# Altium PCB LinearActuator_PCB.PcbDoc
Units mm, origin at the board's own origin, x right, y up, seen from the top; angles counter-clockwise.
Board outline 80 x 25 mm, 2 copper layers (Top Layer, Bottom Layer); 27 components, 34 nets, 114 pads, 2 vias.
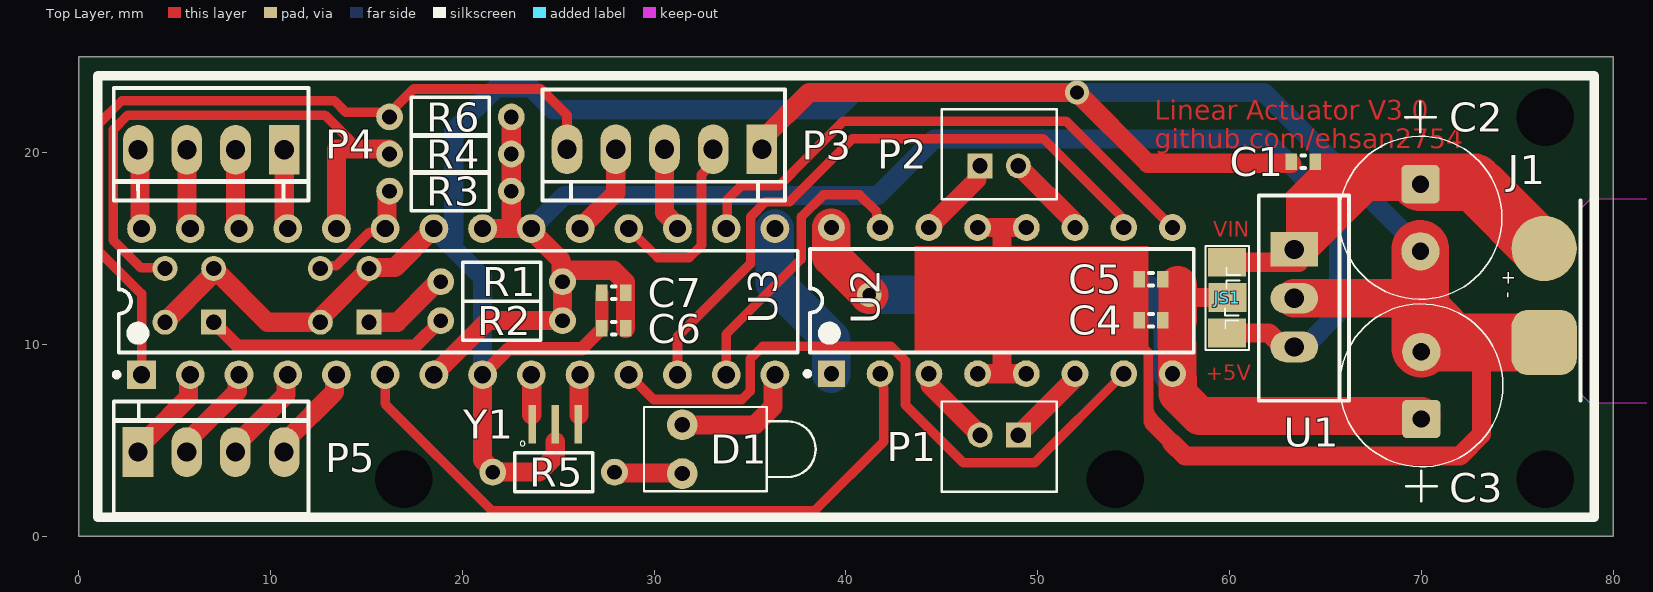
[diagram p0: Top Layer view]
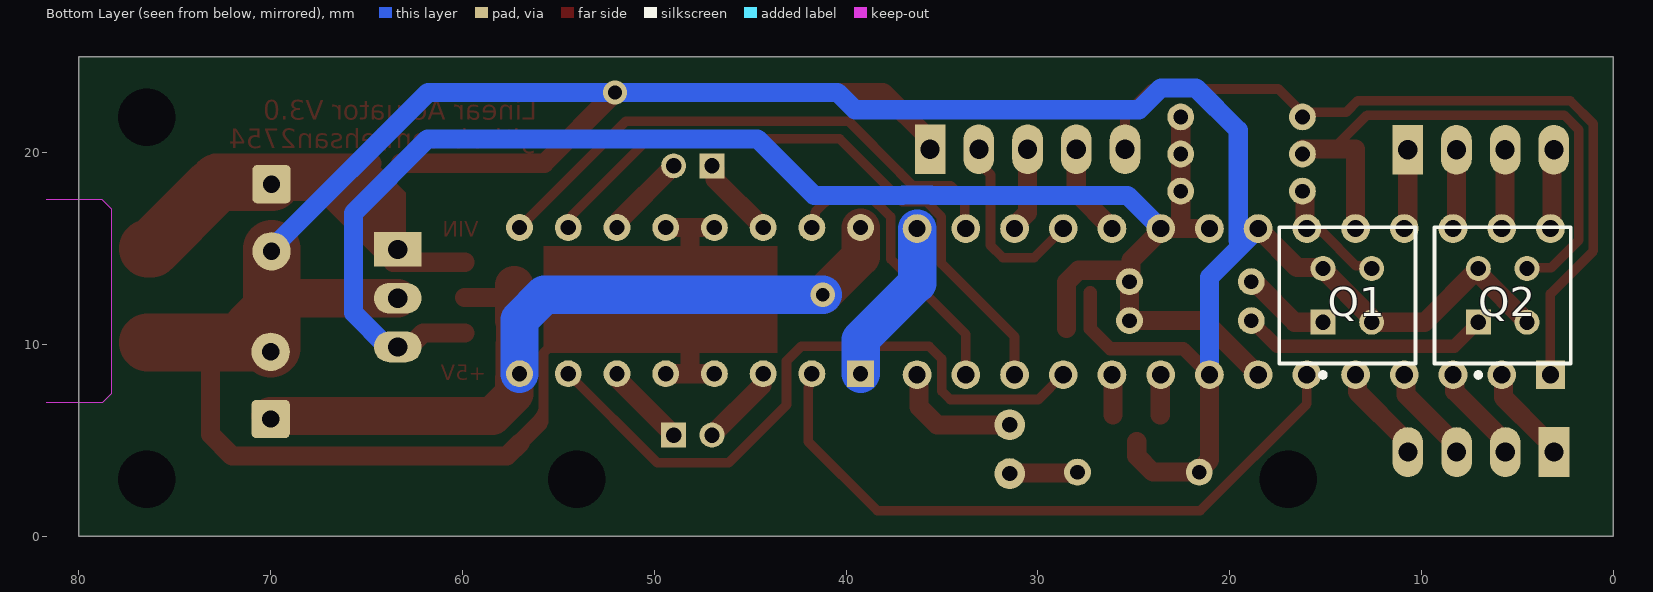
[diagram p1: Bottom Layer view, seen from below]
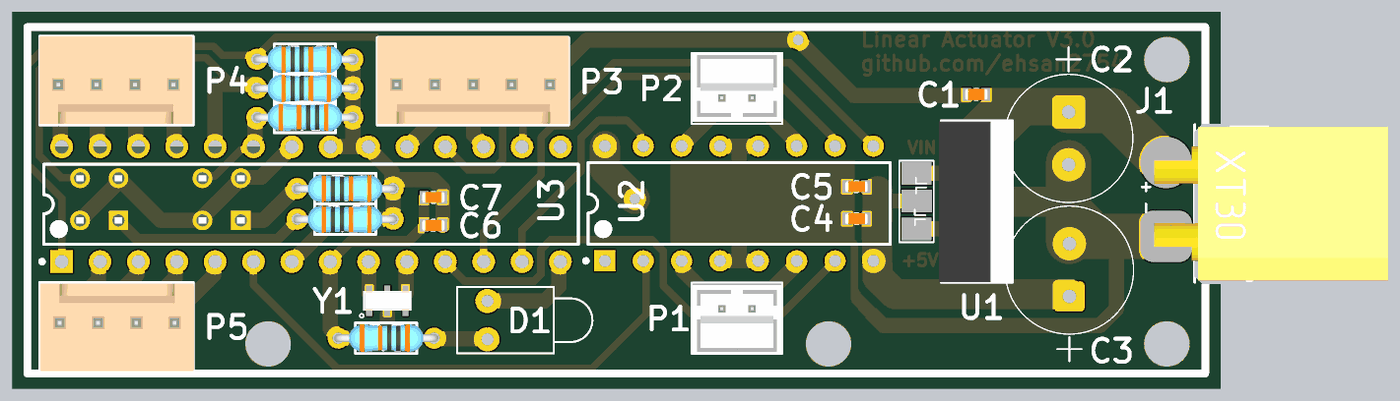
[diagram p2: 3D render of the assembled board from above, using the file's embedded part models]

## Layer stack, top to bottom
Top Solder: solder mask 0.0102, Solder Resist, Dk 3.5
Top Layer: signal copper 0.0356
Dielectric 1: dielectric 0.32, FR-4, Dk 4.8
Bottom Layer: signal copper 0.0356
Bottom Solder: solder mask 0.0102, Solder Resist, Dk 3.5

## Board outline
0,0 80,0 80,25 0,25

## Design rules (kind name [scope] priority, off if disabled: settings)
Clearance [All] p1: gap=0.254 ignorepadtopadclearanceinfootprint=FALSE except(0: Arc-Hole Track-Hole SMDPad-Hole THPad-Hole Via-Hole Fill-Hole Poly-Hole Region-Hole Text-Hole)
PolygonConnect [All] p1: connectstyle=Relief reliefconductorwidth=0.254 reliefentries=4 polygonreliefangle="90 Angle" airgapwidth=0.254
RoutingVias [All] p1: holewidth=0.711 width=2.5 viastyle="Through Hole" minholewidth=1.5 minwidth=1.27 maxholewidth=4 maxwidth=5
SolderMaskExpansion [All] p1: expansion=0.102 istentingtop=FALSE
Width [All] p1: maxlimit=3 minlimit=0.5 preferedwidth=0.7
30 further rules are at their usual default settings.

## Components (designator, comment, footprint, x,y, rotation, side; value= is the part's Value field where it differs from the comment)
C1 "100nF" SMD_CAP_0603 63.837,19.525 r180 top
C2 "470uF,50V" "CAPE R3.5" 69.949,16.607 r270 top
C3 "220uf,25V" "CAPE R3.5" 69.997,7.867 r90 top
C4 "100nF" SMD_CAP_0603 55.903,11.27 r180 top
C5 "1uF" SMD_CAP_0603 55.903,13.404 r180 top
C6 "100nF" SMD_CAP_0603 27.886,10.838 r180 top
C7 "1uF" SMD_CAP_0603 27.886,12.693 r180 top
D1 "LED1" LED-1 31.468,4.539 r0 top
J1 "XT30-M" "XT30-M side" 76.4,15.004 r270 top
JS1 "JumperSMD 3Pin" "JumperSMD 3Pin" 59.916,13.471 r180 top
P1 "Connector" "PH Connector 2Pin" 47.935,5.326 r180 top
P2 "Connector" "PH Connector 2Pin" 48.035,19.265 r0 top
P3 "Connector" "Polarized Header 5" 30.579,20.149 r180 top
P4 "Connector" "Polarized Header 4" 6.875,19.949 r180 top
P5 "Connector" "Polarized Header 4" 6.925,4.587 r0 top
Q1 "CNY70" FP-6_544-5062_01-4-MFG 13.866,12.56 r90 bottom
Q2 "CNY70" FP-6_544-5062_01-4-MFG 5.763,12.56 r90 bottom
R1 "330R" Res-(1/4) 22.044,13.277 r0 top
R2 "330R" Res-(1/4) 22.044,11.245 r0 top
R3 "10K" Res-(1/4) 19.377,17.996 r180 top
R4 "10K" Res-(1/4) 19.377,19.929 r0 top
R5 "330R" Res-(1/4) 24.757,3.345 r180 top
R6 "10K" Res-(1/4) 19.377,21.862 r0 top
U1 "78M05" TO220-AB-Stand 63.354,12.432 r270 top
U2 "L293D" STM-L293D-16 48.13,12.285 r90 top
U3 "ATmega8-16PU" 28P3 19.784,12.235 r90 top
Y1 "CSTCE8M00G55-R0" *OSC_CSTCE8M00G55-R0 24.838,5.835 r0 top

## Footprints (in the part's own frame and the unit in brackets; to place one, negate y for a bottom-side part, rotate by r counter-clockwise, add the part's x,y. Pads: shape width x height; smd on the part's side, far side on the other; paste and mask are expansions set on the pad)
28P3 [mm] "28-Pin Plastic Dual In-Line Package (PDIP)"
  rect 1.5x1.5 hole 0.9: 1(-3.81,16.51)
  round 1.5 hole 0.9: 2(-3.81,13.97) 3(-3.81,11.43) 4(-3.81,8.89) 5(-3.81,6.35) 6(-3.81,3.81) 7(-3.81,1.27) 8(-3.81,-1.27) 9(-3.81,-3.81) 10(-3.81,-6.35) 11(-3.81,-8.89) 12(-3.81,-11.43) 13(-3.81,-13.97) 14(-3.81,-16.51) 15(3.81,-16.51) 16(3.81,-13.97) 17(3.81,-11.43) 18(3.81,-8.89) 19(3.81,-6.35) 20(3.81,-3.81) 21(3.81,-1.27) 22(3.81,1.27) 23(3.81,3.81) 24(3.81,6.35) 25(3.81,8.89) 26(3.81,11.43) 27(3.81,13.97) 28(3.81,16.51)
  silkscreen extent -3.93,-17.7 2.65,17.93, body extent -3.6,-17.65 3.6,17.65, height 4.58
*OSC_CSTCE8M00G55-R0 [mm]
  rect 0.4x2 smd: 1(-1.2,0) 2(0,0) 3(1.2,0)
  silkscreen extent -1.83,-1.13 -1.57,-0.87, body extent -1.6,-0.65 1.6,0.65, height 1
"CAPE R3.5" [mm]
  round 0.508 on Mech15: 0(0,0)
  rrect25% 2x2 hole 0.9: 1(-1.75,0)
  round 2 hole 0.9: 2(1.75,0)
  silkscreen extent -6.05,-4.25 4.25,4.25, body extent -4.25,-4.25 4.22,4.23, height 7.1
FP-6_544-5062_01-4-MFG [mm]
  rect 1.3x1.3 hole 0.8 paste-1000 mask+0: 1(-1.4,1.27)
  round 1.3 hole 0.8 paste-1000 mask+0: 2(1.4,1.27) 3(-1.4,-1.27) 4(1.4,-1.27)
  silkscreen extent -4.27,-3.55 3.55,3.55, body extent -3.5,-3.5 3.5,3.5, height 6
"JumperSMD 3Pin" [mm]
  rect 2x1.5 smd: 1(0.051,2.87) 2(0.025,1.016) 3(0.051,-0.813)
  silkscreen extent -1.09,-1.66 1.18,3.77
LED-1 [mm] "LED; 2 Leads"
  round 1.6 hole 0.8: 1(0,1.27) 2(0,-1.27)
  silkscreen extent -2,-2.2 6.95,2.2
"PH Connector 2Pin" [mm]
  rect 1.3x1.3 hole 0.8: 1(-1.05,0.05)
  round 1.3 hole 0.8: 2(0.95,0.05)
  silkscreen extent -3.05,-1.7 2.95,3, body extent -3.05,-1.57 2.95,3.08, height 6.07
"Polarized Header 4" [mm]
  rect 1.6x2.6 hole 1: 1(-3.84,-0.2)
  oval 1.6x2.6 hole 1: 2(-1.3,-0.2) 3(1.24,-0.2) 4(3.78,-0.2)
  silkscreen extent -5.1,-3.42 5.05,2.45, body extent -5.06,-3.43 5.1,2.37, height 10.75
"Polarized Header 5" [mm]
  rect 1.6x2.6 hole 1: 1(-5.035,-0.03)
  oval 1.6x2.6 hole 1: 2(-2.495,-0.03) 3(0.045,-0.03) 4(2.585,-0.03) 5(5.125,-0.03)
  silkscreen extent -6.25,-3.15 6.4,2.65, body extent -6.3,-3.23 6.4,2.57, height 10.75
Res-(1/4) [mil]
  round 55 hole 30: 1(-125,0) 2(125,0)
  silkscreen extent -80,-40 80,40, body extent -135,-36 135,36, height 115
SMD_CAP_0603 [mm]
  rect 0.6x0.85 smd: 1(-0.622,0) 2(0.622,0)
  silkscreen extent -0.1,-0.33 0.1,0.33, body extent -0.76,-0.38 0.76,0.38, height 0.6
STM-L293D-16 [mm] "DIP, 16-Leads, Body 20x6.85mm, Pitch 2.54mm"
  rect 1.4x1.4 hole 0.8: 1(-3.81,8.89)
  round 1.4 hole 0.8: 2(-3.81,6.35) 3(-3.81,3.81) 4(-3.81,1.27) 5(-3.81,-1.27) 6(-3.81,-3.81) 7(-3.81,-6.35) 8(-3.81,-8.89) 9(3.81,-8.89) 10(3.81,-6.35) 11(3.81,-3.81) 12(3.81,-1.27) 13(3.81,1.27) 14(3.81,3.81) 15(3.81,6.35) 16(3.81,8.89)
  silkscreen extent -3.93,-10 2.7,10.26, body extent -3.93,-10 3.93,10, height 5.1
TO220-AB-Stand [mm]
  rect 1.8x2.5 hole 1: 1(-2.521,0.016)
  oval 1.6x2.5 hole 1: 2(0.019,0.016) 3(2.559,0.016)
  silkscreen extent -5.33,-1.83 5.37,2.87, body extent -5.3,-2 5.37,2.83, height 20.86
"XT30-M side" [mm]
  rrect50% 3.4x3.4 smd: MINUS(4.9,0)
  round 3.4 smd: PLUS(0,0)
  Top Layer pour cut-out: -1.75,1.9 -1.75,0 0,-1.75 4.775,-1.75 6.65,0.125 6.65,2.7 -1.625,2.7 -1.775,2.55
  Keep-Out Layer board cut-out: -2.575,14.775 -2.575,2.4 -2.075,1.9 7.575,1.9 8.05,2.375 8.05,14.775
  silkscreen extent -2.5,1.9 7.93,1.9, body extent -2.47,-0.8 7.93,14.7, height 4

## Part data
C1 C4 C5 C6 C7: library part Cap-Bipolar, "Bipolar Capacitor", Voltage=100V, Adding Date=1387/12/20, Designer="Saeid Jorablo", Organazation=ControTec
C2 C3: library part "Capacitor Polarized", Designer="Hamed Jafarzadeh ( R2T )"
D1: "Typical RED GaAs LED", LatestRevisionDate=08-Jul-2005, LatestRevisionNote="Mech Layer 1 removed.", PackageDescription="LED; 2 Leads", PackageReference=LED-1, Published=8-Jun-2000, Publisher="Altium Limited"
J1: Package="Package Analog Devices", Availability=Unavailable, MF=AMASS, MP=XT60-M, Price=None, SnapEDA_Link=https://www.snapeda.com/parts/XT60-M/AMASS/view-part/?ref=snap
P1 P2: library part "Connector 2Pin", Designer="Hamed Jafarzadeh - www.R2T.ir"
P3: library part "Connector 5Pin", Designer="Hamed Jafarzadeh - www.R2T.ir"
P4 P5: library part "Connector 4Pin", Designer="Hamed Jafarzadeh - www.R2T.ir"
Q1 Q2: library part CMP-02521-000007-1, "SENSOR OPTO TRANS 5MM REFLTH PCB", Ambient Temperature Range High=+85°C, Ambient Temperature Range Low=-40°C, Collector Emitter Voltage=32V, Emiiter Collector Voltage=7V, Forward Current=50mA, Forward Voltage=1.25V, Manufacturer="Vishay Semiconductor Opto Division", Max Junction Temp=+100°C, Package=6.544-5062.01-4, Power Dissipation=200mW, Reverse Voltage=5V, Temperature="to +100°C", Automotive=No, Category=Trans, ComponentLink2Description=Datasheet, ComponentLink2URL=http://www.vishay.com/docs/83751/cny70.pdf, Device Class L1=Optoelectronics, Device Class L2=Optocouplers, Device Class L3=unset, Digikey Description="SENSOR OPTO TRANS 5MM REFLTH PCB", Height=6mm, Lead Free=Yes, Manufacturer Part Number=CNY70, Mouser Description="CNY70 Series 1 mA 1.25 V 950 nm 200 mW Reflective Optical Sensor 4 Pin", Octopart=https://octopart.com/cny70-vishay-39692873, RoHS=TRUE, Temperature Range High=+100°C, Wavelength=940nm
R1 R2 R3 R4 R5 R6: library part Resistor, "Resistor", Power="1/8 W", Tolerance=5%
U1: library part Regulator
U2: library part CMP-2000-06524-1, "Push-Pull Four Channel Driver with Diode, 4.5 to 36 V, -40 to 150 degC, 16-Pin PDIP, RoHS, Tube", Current - Output / Channel=600mA, Current - Peak Output=1.2A, Manufacturer=STMicroelectronics, On-State Resistance=-, Operating Temperature=-40°C~150°C, Package / Case="16-DIP(0.300\",7.62mm)", Package Description="16-Pin Thru-Hole Dual-In-Line, Body 20 x 6.85 mm, Pitch 2.54 mm", Package Reference=DIP-16, Standard Package=25, Supplier Device Package=16-PowerDIP, Voltage - Supply=4.5V~36V, Category=IntegratedCircuits(ICs), Datasheet URL=http://www.st.com/st-web-ui/static/active/en/resource/technical/document/datasheet/CD00000059.pdf, Datasheet Version=07/2003, Dynamic Catalog=HalfBridge, Family=PMIC-MOSFET,BridgeDrivers-InternalSwitch, Input Type=Non-Inverting, Manufacturer URL=http://www.st.com/, Mounting Technology=ThroughHole, Mounting Type=ThroughHole, Number of Outputs=4, Other Names=497-2936-5, Other Related Documents=L293DViewAllSpecifications, Packaging=Tube, PartNumber=L293D, Series=-, Type=HalfBridge
U3: library part CMP-0095-00372-1, "8-bit AVR Microcontroller, 4.5-5.5V, 16MHz, 8KB Flash, 512 Bytes EEPROM, 1KB SRAM, 28-pin PDIP, Industrial Grade (-40°C to 85°C)", ComponentLink1Description="Manufacturer URL", ComponentLink1URL=http://www.atmel.com/, ComponentLink2Description=ATmega8(L), ComponentLink2URL=http://www.atmel.com/dyn/resources/prod_documents/doc2486.pdf, ComponentLink3Description="ATmega8(L) Summary", ComponentLink3URL=http://www.atmel.com/dyn/resources/prod_documents/2486S.pdf, DatasheetVersion="revZ, Feb-2011", PackageDescription="28-lead (0.300\"/7.62mm Wide) Plastic Dual Inline Package (PDIP)", PackageReference=28P3, PackageVersion="revB, Sep-2001"
Y1: "Ceramic Resonator 8MHz ??0.5% _Tol_ ??0.2% _Stability_ 33pF 40Ohm 3-Pin CSMD T/R", Package="SMD-3 Murata", ChipDip_Link=https://www.chipdip.ru/product1/8001783721, HelpURL=https://www.murata.com/en-eu/api/pdfdownloadapi?cate=&partno=CSTCE8M00G55-R0, MF=Murata, MP=CSTCE8M00G55-R0, SnapEDA_Link=https://www.snapeda.com/parts/CSTCE8M00G55-R0/Murata%20Electronics%20North%20America/view-part/?ref=snap, Type=SMD

## Free pads (board coordinates)
  round 1.2 hole 3: 1(16.939,2.964) 2(54.048,2.964) 3(76.451,2.964) 4(76.451,21.837)

## Via types
v1: diameter 1.27, hole 0.711, Top Layer to Bottom Layer, 2 vias

## Nets (pads, with @x,y where several pads share a name; then routed paths per layer and width w, separated by ;. In a path a pad name is that pad's centre, name@x,y a point inside that pad or via, vN(x,y) a via of type N, cw(c..) or ccw(c..) an arc to the next point about the centre after c; other vN are vias at no path point)
+12: C1.1 C2.1 J1.PLUS JS1.3 U1.1 | length 27.7
  Top Layer w1: JS1.3 63.606,14.284 U1.1@63.839,14.517 ; C1.1@64.716,19.449 69.949,19.449 72.91,19.449
  Top Layer w2: U1.1 63.52,14.953 67.051,18.484 C2.1@69.949,18.484
  Top Layer w3: C2.1@69.949,18.458 72.736,18.458 ; 73.038,18.182 J1.PLUS@76.216,15.004 ; J1.PLUS@76.292,15.004 J1.PLUS
GND: C1.2 C2.2 C3.2 C4.2 C5.2 C6.2 C7.2 J1.MINUS P3.1 Q1.2 Q1.3 Q2.2 Q2.3 R5.2 U1.2 U2.4 U2.5 U2.12 U2.13 U3.8 U3.22 Y1.2 | length 200.5
  Top Layer w0.5: Q2.3 Q2.3@4.528,11.126 ; 55.191,10.127 55.77,9.548 55.77,6.094 56.969,4.895 ; C4.2 C5.2
  Top Layer w0.7: U3.8 22.408,9.779 26.23,9.779 27.264,10.813 C6.2 C7.2
  Top Layer w1: Q2.3 4.493,11.175 6.976,13.658 6.976,13.903 Q2.2 9.833,11.16 Q1.3 12.653,11.218 12.653,11.435 15.136,13.918 Q1.2 15.193,14.018 16.486,14.018 U3.22 ; U3.8 21.054,3.981 21.582,3.453 R5.2 24,3.345 24.846,4.191 Y1.2@24.846,4.925 ; P3.1 35.614,20.679 38.074,23.139 v1(52.045,23.139) 55.735,19.449 C1.2@63.215,19.449 ; U2.4 48.13,8.475 ; U2.13 48.13,16.095 ; U2.5 48.13,8.475 ; U2.12 48.13,16.095 ; 56.969,4.895 57.681,4.184 72.006,4.184 73.124,5.301 73.124,10.104 ; 48.13,8.475 48.13,16.095
  Top Layer w2: U1.2 69.337,12.413 69.949,11.801 69.997,11.753
  Top Layer w3: 69.949,11.753 69.949,9.817 69.997,9.769 70.332,10.104 73.124,10.104 ; 69.949,11.801 C2.2 C2.2@69.949,14.984 ; 69.997,11.753 70.989,10.761 ; 73.2,10.104 J1.MINUS
  Bottom Layer w1: U3.22 21.054,13.505 U3.8 ; 19.55,15.423 19.55,21.168 21.752,23.37 23.584,23.37 24.721,22.233 39.532,22.233 40.438,23.139 v1(52.045,23.139) 61.793,23.139 C2.2@69.949,14.984
IN1: U2.2 U3.6 | length 34.9
  Top Layer w0.5: U3.6 15.974,6.901 21.545,1.33 38.367,1.33 41.974,4.937 41.974,7.733 41.952,7.754 41.952,8.303 U2.2
IN2: U2.7 U3.11 | length 34.3
  Top Layer w0.5: U3.11 29.969,7.13 34.567,7.13 35.008,7.571 35.008,9.248 35.659,9.899 42.339,9.899 43.101,9.137 43.101,6.851 46.124,3.828 49.833,3.828 U2.7
IN3: U2.10 U3.12 | length 33.1
  Top Layer w0.5: U3.12 31.214,10.407 35.024,14.217 35.024,16.655 35.811,17.442 37.056,17.442 40.34,20.726 50.292,20.726 54.308,16.71 54.308,16.268 U2.10
IN4: U2.15 U3.13 | length 15.5
  Top Layer w0.5: U3.13 33.754,10.534 37.665,14.445 37.665,16.648 38.816,17.798 40.713,17.798 41.608,16.904 41.608,16.268 U2.15
MISO: P3.2 U3.18 | length 10
  Top Layer w0.5: U3.18 30.198,14.521 31.823,14.521 32.468,15.166 32.468,18.851 33.074,19.457 P3.2@33.074,20.254
MOSI: P3.3 U3.17 | length 4.5
  Top Layer w1: P3.3@30.534,20.254 30.534,16.861 31.214,16.181 U3.17
NetC3_1: C3.1 C4.1 C5.1 JS1.2 U2.8 U2.16 | length 45
  Top Layer w1: 57.249,13.099 57.3,13.048 57.893,12.455 JS1.2
  Top Layer w2: U2.16 39.24,14.572 v1(41.221,12.591) ; 57.249,9.98 57.249,11.27 ; U2.8@57.274,8.475 57.274,9.98 ; U2.8@57.289,8.206 57.289,7.423 58.444,6.269 C3.1@69.997,6.269 ; 57.3,11.27 57.3,13.048 57.3,13.099
  Bottom Layer w2: v1(41.221,12.591) 55.725,12.591 57.02,11.296 U2.8
NetD1_1: D1.1 U3.14 | length 6.8
  Top Layer w1: D1.1 35.252,5.809 36.198,6.755 36.198,8.33 U3.14
NetD1_2: D1.2 R5.1 | length 3.6
  Top Layer w1: R5.1 27.97,3.307 31.43,3.307 D1.2
NetP1_1: P1.1 U2.6 | length 4.4
  Top Layer w1: P1.1 51.864,8.154 51.864,8.399 U2.6
NetP1_2: P1.2 U2.3 | length 4.3
  Top Layer w1: U2.3 44.397,8.399 44.397,7.864 P1.2
NetP2_1: P2.1 U2.14 | length 4.3
  Top Layer w1: U2.14 46.835,18.61 46.835,19.165 P2.1
NetP2_2: P2.2 U2.11 | length 4.4
  Top Layer w1: P2.2 51.864,16.436 51.864,16.172 U2.11
NetP4_1: P4.1 U3.25 | length 4.2
  Top Layer w1: P4.1 10.715,16.359 10.894,16.181 U3.25
NetP4_2: P4.2 U3.26 | length 4.2
  Top Layer w1: P4.2 8.175,16.359 8.354,16.181 U3.26
NetP4_3: P4.3 U3.27 | length 4.2
  Top Layer w1: P4.3 5.635,16.359 5.814,16.181 U3.27
NetP4_4: P4.4 U3.28 | length 4.2
  Top Layer w1: P4.4 3.185,20.06 3.185,16.135 U3.28
NetP5_1: P5.1 U3.2 | length 4.4
  Top Layer w1: P5.1@3.385,5.187 3.668,5.187 5.718,7.237 5.718,8.33 U3.2
NetP5_2: P5.2 U3.3 | length 5.2
  Top Layer w1: P5.2 5.625,4.931 8.258,7.563 8.258,8.33 U3.3
NetP5_3: P5.3 U3.4 | length 5.2
  Top Layer w1: P5.3 8.165,4.732 10.798,7.365 10.798,8.33 U3.4
NetP5_4: P5.4 U3.5 | length 5.2
  Top Layer w1: P5.4 10.901,4.583 10.901,5.083 13.338,7.52 13.338,8.33 U3.5
NetQ1_1: Q1.1 R1.1 | length 4.6
  Top Layer w1: Q1.1 16.603,11.16 18.644,13.201 18.793,13.201 R1.1
NetQ2_1: Q2.1 R2.1 | length 12.9
  Top Layer w0.7: Q2.1 8.287,9.906 17.531,9.906 R2.1
NetU3_9: U3.9 Y1.1 | length 2.1
  Top Layer w1: U3.9 23.616,8.403 Y1.1@23.616,6.335
NetU3_10: U3.10 Y1.3 | length 2.1
  Top Layer w1: Y1.3@26.086,6.335 26.086,8.378 U3.10
PWM1: U2.1 U3.15 | length 8.8
  Bottom Layer w2: U3.15 36.294,13.201 39.24,10.254 U2.1
PWM2: U2.9 U3.16 | length 28.7
  Top Layer w0.5: U3.16 33.806,16.098 33.806,17.545 34.541,18.281 36.528,18.281 37.208,18.961 37.208,18.978 39.871,21.641 51.475,21.641 U2.9
RES: P3.5 R6.1 U3.1 | length 42
  Top Layer w0.5: U3.1 3.274,12.642 1.037,14.878 1.037,21.502 2.243,22.707 13.325,22.707 13.916,22.116 16.253,22.116 17.456,23.319 24.093,23.319 25.454,21.958 P3.5
SCK: P3.4 U3.19 | length 5
  Top Layer w1: U3.19 27.994,17.905 P3.4@27.994,20.254
SEN0: Q1.4 R3.2 U3.23 | length 6.3
  Top Layer w0.5: Q1.4 12.749,14.114 13.427,14.114 15.168,15.854 15.782,15.854 U3.23
  Top Layer w1: U3.23 16.069,16.141 R3.2@16.069,18.06
SEN1: Q2.4 R4.1 U3.24 | length 29.7
  Top Layer w0.5: Q2.4 4.457,13.997 3.24,13.997 1.791,15.445 1.791,19.109 1.791,21.19 2.555,21.953 12.834,21.953 14.605,20.183
  Top Layer w1: U3.24 13.434,20.183 ; 13.529,20.183 14.605,20.183 R4.1@16.202,20.183
VCC: C6.1 C7.1 JS1.1 R1.2 R2.2 R3.1 R4.2 R6.2 U1.3 U3.7 U3.20 U3.21 | length 86.5
  Top Layer w1: U3.7 21.346,11.258 21.359,11.245 R2.2 R1.2 25.143,13.353 25.143,13.872 25.143,14.394 23.492,16.045 22.552,16.045 U3.21 ; R6.2 R4.2 R3.1 22.552,16.198 22.609,16.141 23.498,16.141 U3.20 U3.20@23.689,15.95 ; R1.2@25.219,13.872 27.877,13.872 28.509,13.24 C7.1 C6.1 ; JS1.1 62.057,10.601 62.785,9.873 U1.3
  Bottom Layer w1: R3.1 R3.1@22.628,17.92 ; U3.20 25.321,17.773 35.54,17.773 35.567,17.799 37.02,17.799 37.047,17.773 41.666,17.773 44.612,20.719 61.821,20.719 65.682,16.858 65.682,11.651 63.904,9.873 U1.3
pads on no net: C2.0 C3.0

## Other copper
Top Layer:
  rectangle net GND: 43.584,9.543 55.776,15.131
  region net GND: 57.277,5.232 56.279,6.23 cw(c57.06,7.01) 55.956,7.01 55.831,7.01 ccw(c55.831,6.577) 55.524,6.883 55.524,6.017 ccw(c56.131,6.017) 55.702,5.588 57.023,4.242
  region net +12: 64.712,19.652 62.964,17.904 62.964,14.953 63.7,14.953 68.399,19.652
  text "Linear Actuator V3.0 / github.com/ehsan2754" at 56.109,20.218 h1
  text "VIN" at 59.158,15.61 h0.8
  text "+5V" at 58.743,8.143 h0.8

## Silkscreen, mask and mechanical layers (free items; w line width, h text height)
Top Overlay:
  lines w0.5: 1,1 79,1 79,24 1,24 1,1
Mechanical 1:
  the board outline again, w1

## Text inside footprints (layer, text, board x,y; h text height)
J1: Top Overlay "+ -" at 74.25,13.879 h0.7 r270